# Altium PCB 3LED_WITHE_CYT.PcbDoc
Units mm, origin at the board's own origin, x right, y up, seen from the top; angles counter-clockwise.
Board outline 25.65 x 17.65 mm, 2 copper layers (Top Layer, Bottom Layer); 11 components, 11 nets, 44 pads, 0 vias.
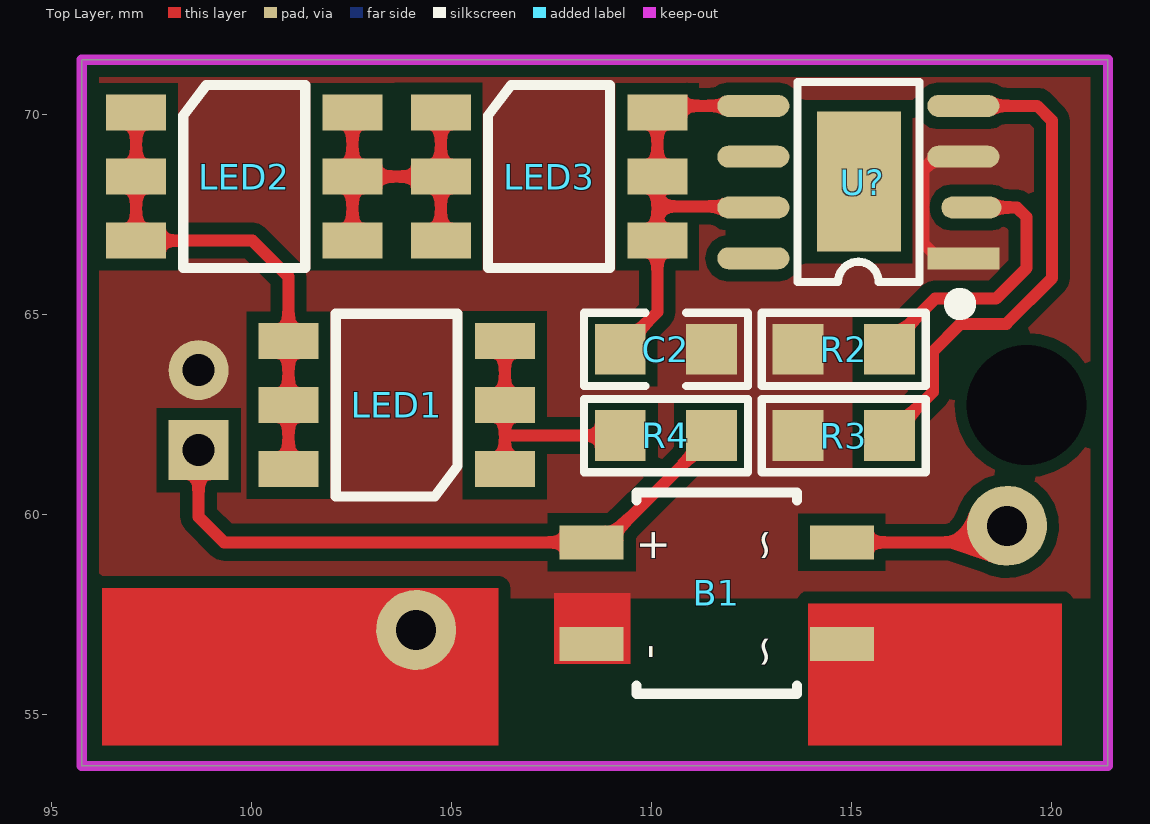
[diagram p0: Top Layer view]
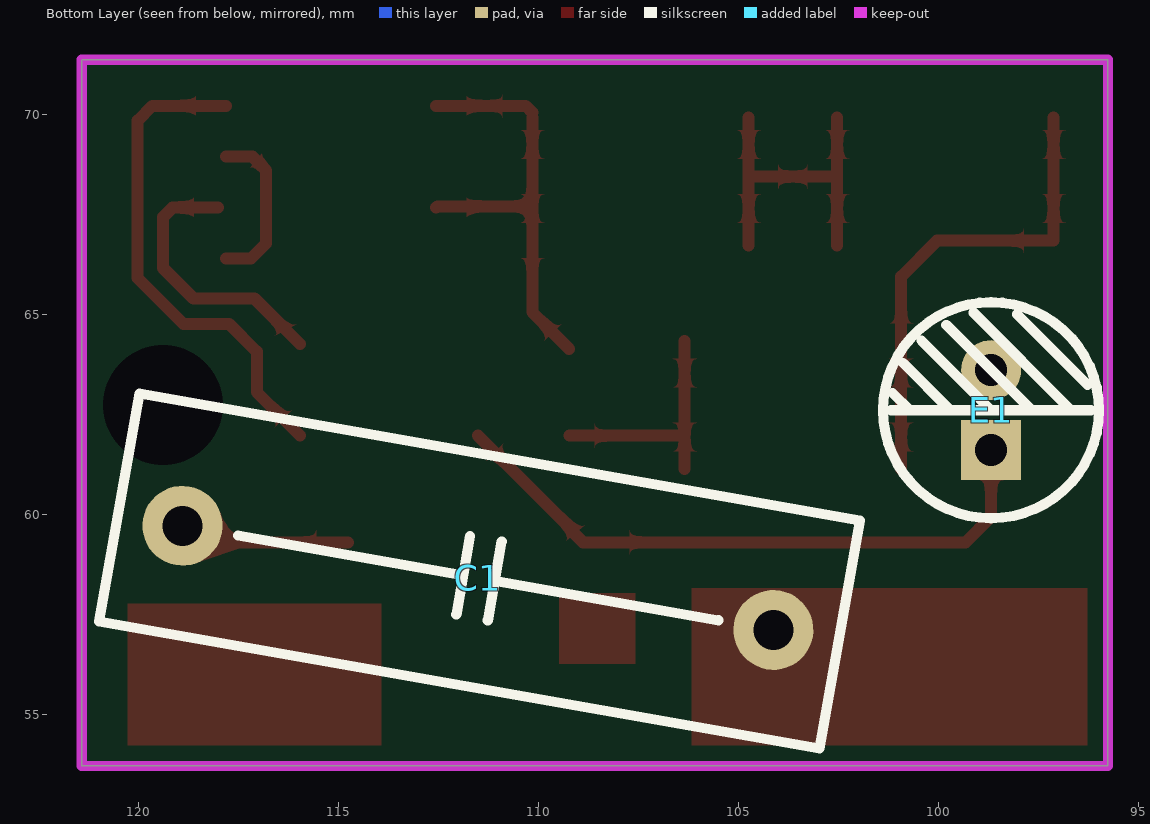
[diagram p1: Bottom Layer view, seen from below]
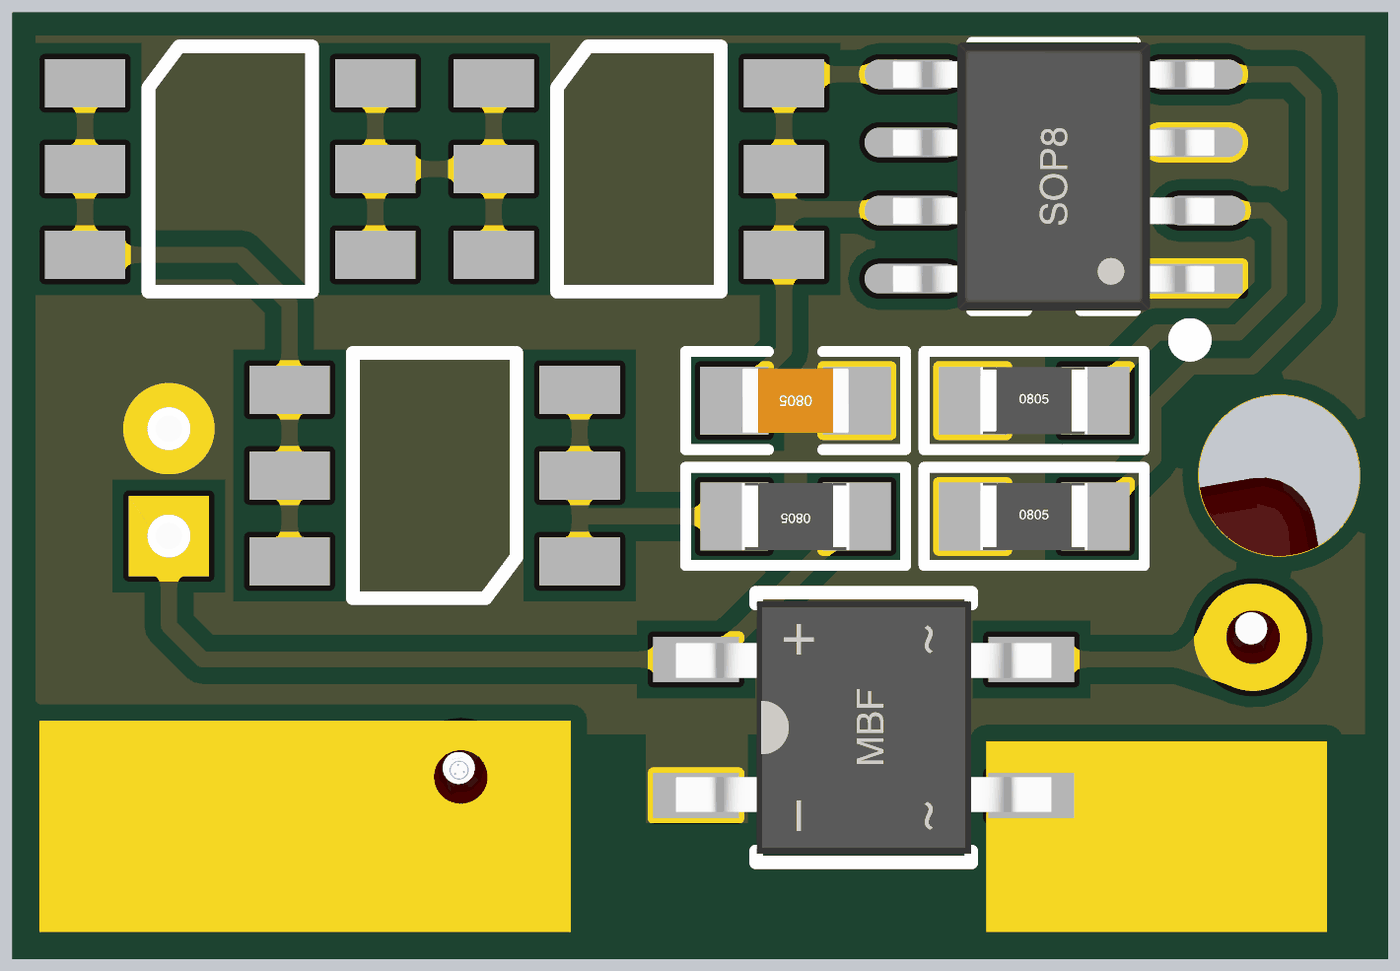
[diagram p2: 3D render of the assembled board from above, using the file's embedded part models]

## Layer stack, top to bottom
Top Solder: solder mask 0.0102, Solder Resist, Dk 3.5
Top Layer: signal copper 0.0356
Dielectric 1: dielectric 0.32, FR-4, Dk 4.8
Bottom Layer: signal copper 0.0356
Bottom Solder: solder mask 0.0102, Solder Resist, Dk 3.5

## Board outline
95.758,53.721 95.758,71.374 121.412,71.374 121.412,53.721

## Design rules (kind name [scope] priority, off if disabled: settings)
Clearance [All] p1: gap=0.3 ignorepadtopadclearanceinfootprint=FALSE
PolygonConnect PolygonConnect_1 [All vs IsNamedPolygon('GND1_L01_P000')] p1: connectstyle=Direct reliefconductorwidth=0.254 reliefentries=4 polygonreliefangle="90 Angle" airgapwidth=0.254
PolygonConnect [All] p2: connectstyle=Relief reliefconductorwidth=0.254 reliefentries=4 polygonreliefangle="90 Angle" airgapwidth=0.254
RoomDefinition Mine [InComponentClass('Mine')] p1: confinementstyle=ConfineIn formatcopy=TRUE lockcomponents=FALSE outline 95.504,53.594 121.539,53.594 121.539,71.628 95.504,71.628
RoutingVias [All] p1: holewidth=0.711 width=1.27 viastyle="Through Hole" minholewidth=0.711 minwidth=1.27 maxholewidth=0.711 maxwidth=1.27
SolderMaskExpansion [All] p1: expansion=0.102 istentingtop=FALSE
Width [All] p1: maxlimit=1 minlimit=0.3 preferedwidth=0.5
30 further rules are at their usual default settings.

## Components (designator, comment, footprint, x,y, rotation, side; value= is the part's Value field where it differs from the comment)
B1 "MB10F" MBF 111.633,58.039 r180 top
C1 "=Value" "CBB 15*18*11" 111.506,58.42 r10 bottom
C2 "10nF" "C 0805" 110.363,64.135 r180 top
E1 "10uF" "CAP 2.0*5*11" 98.679,62.611 r90 bottom
LED1 "LED 5050 WITHE" "LED 5050" 103.632,62.738 r180 top
LED2 "LED 5050 WITHE" "LED 5050" 99.822,68.453 r0 top
LED3 "LED 5050 WITHE" "LED 5050" 107.442,68.453 r0 top
R2 "=Value" "R 0805" 114.808,64.135 r0 top
R3 "=Value" "R 0805" 114.808,61.976 r0 top
R4 "=Value" "R 0805" 110.363,61.976 r180 top
U? "CYT100A" SOP8_N-EP 115.174,68.315 r180 top

## Footprints (in the part's own frame and the unit in brackets; to place one, negate y for a bottom-side part, rotate by r counter-clockwise, add the part's x,y. Pads: shape width x height; smd on the part's side, far side on the other; paste and mask are expansions set on the pad)
"C 0805" [mil] "ï؟½ق¼ï؟½ï؟½ï؟½ï؟½ï؟½ئ¬ï؟½ï؟½ï؟½ï؟½"
  rect 50x50 smd: 1(-45,0) 2(45,0)
  silkscreen extent -81,-36 81,36, body extent -39,-24 39,24, height 20
"CAP 2.0*5*11" [mm] "ï؟½إ¾ï؟½2mmض±ï؟½ï؟½5mmï؟½ك¶ï؟½11mm"
  rect 1.5x1.5 hole 0.8: 1(-1,0)
  round 1.5 hole 0.8: 2(1,0)
  silkscreen extent -2.7,-2.7 2.7,2.7, body extent -2.5,-2.5 2.51,2.5, height 11.04
"CBB 15*18*11" [mm] "ï؟½إ¾ï؟½15mmï؟½ï؟½18mmï؟½ï؟½11mm"
  round 2 hole 1: 1(-7.5,0) 2(7.5,0)
  silkscreen extent -9.15,-3.07 9.14,2.72, body extent -9.01,-2.92 8.99,2.58, height 11.53
"LED 5050" [mm] "ï؟½ï؟½ة«5050LED"
  rect 1.5x0.9 smd: 1(-2.705,1.6) 2(-2.705,0) 3(-2.705,-1.6) 4(2.705,-1.6) 5(2.705,0) 6(2.705,1.6)
  silkscreen extent -1.52,-2.29 1.52,2.29, body extent -2.7,-2.5 2.7,2.5, height 1.65
MBF [mm] "4.7*7*1.5mm(³¤؟ي¸ك)"
  rect 1.6x0.85 smd: AC1(-3.127,1.27) AC2(-3.127,-1.27) DC+(3.127,-1.27) DC-(3.127,1.27)
  silkscreen extent -2.01,-2.51 2.01,2.51, body extent -3.5,-2.35 3.5,2.35, height 1.6
"R 0805" [mm] "1/8Wï؟½ï؟½ئ¬ï؟½ï؟½ï؟½ï؟½"
  rect 1.27x1.27 smd: 1(-1.143,0) 2(1.143,0)
  silkscreen extent -2.05,-0.91 2.05,0.91, body extent -1,-0.62 1,0.63, height 0.5
SOP8_N-EP [mm] "5*6*1.8mm£¨³¤؟ي¸ك£©"
  rect 1.8x0.55 smd: 1(-2.625,1.905)
  oval 1.5x0.55 smd: 2(-2.826,0.635)
  oval 1.8x0.55 smd: 3(-2.625,-0.635) 4(-2.625,-1.905) 5(2.625,-1.905) 6(2.625,-0.635) 7(2.625,0.635) 8(2.625,1.905)
  rect 2.1x3.5 smd: 9(-0.015,-0.011)
  silkscreen extent -2.69,-2.5 1.52,3.2, body extent -3,-2.5 3,2.5, height 1.9

## Part data
B1: "1KV/0.8A rectifier bridge", BOM名称=1KV/0.8A整流桥, 学习资源=www.ooocke.com, 版权归属=源创客
C1: library part C-CBB, "CBB capacitor", BOM名称=CBB电容, 学习资源=www.ooocke.com, 版权归属=源创客
C2: library part C, "Non-polar patch capacitor", BOM名称=无极性贴片电容, 学习资源=www.ooocke.com, 版权归属=源创客
E1: library part C-CAP, "Inline electrolytic capacitor", BOM名称=直插电解电容, 学习资源=www.ooocke.com, 版权归属=源创客
LED1 LED2 LED3: library part LED-SMD, "Patch LED", BOM名称=贴片LED, 学习资源=www.ooocke.com, 版权归属=源创客
R2 R3 R4: library part R, "Chip resistor", BOM名称="Chip resistor", 学习资源=www.ooocke.com, 版权归属=源创客
U?: library part CYT1000A

## Free pads (board coordinates)
  round 0 hole 3: 2(119.38,62.738)

## Nets (pads, with @x,y where several pads share a name; then routed paths per layer and width w, separated by ;. In a path a pad name is that pad's centre, name@x,y a point inside that pad or via, vN(x,y) a via of type N, cw(c..) or ccw(c..) an arc to the next point about the centre after c; other vN are vias at no path point)
FASE: C1.1
GND1: B1.DC- C2.1 E1.2 R2.1 R3.1 U?.1 U?.3 | length 4.1
  Top Layer w0.3: U?.1 117.174,66.41 116.8,66.783 116.8,68.609 117.141,68.95 U?.3
NetB1_AC2: B1.AC2 C1.2 | length 4.9
  Top Layer w0.3: B1.AC2 118.019,59.309 118.107,59.397 119.465,59.397 C1.2@119.553,59.309
NetB1_DC+: B1.DC+ E1.1 R4.1 | length 15.9
  Top Layer w0.3: E1.1 98.679,59.944 99.314,59.309 108.881,59.309 109.156,59.584 109.156,59.626 R4.1
NetLED1_1: LED1.1 LED1.2 LED1.3 R4.2 | length 6.1
  Top Layer w0.3: LED1.1 106.337,61.938 ; LED1.3 LED1.2 106.337,61.938 ; R4.2 106.375,61.976 106.337,61.938
NetLED1_2: LED1.4 LED1.5 LED1.6 LED2.1 LED2.2 LED2.3 | length 12.1
  Top Layer w0.3: LED2.1@97.117,69.926 LED2.2 LED2.3 100.025,66.853 100.927,65.951 LED1.4 LED1.5 LED1.6
NetLED2_2: LED2.4 LED2.5 LED2.6 LED3.1 LED3.2 LED3.3 | length 8.6
  Top Layer w0.3: LED2.4@102.527,66.726 102.527,68.326 LED2.6@102.527,69.926 ; LED2.5 LED3.2 ; LED3.3@104.737,66.726 104.737,68.326 LED3.1@104.737,69.926
NULL: B1.AC1
OUT1: C2.2 LED3.4 LED3.5 LED3.6 U?.5 U?.7 | length 11
  Top Layer w0.3: C2.2@109.228,64.143 110.147,65.062 110.147,67.705 ; LED3.6@110.147,69.926 LED3.5 110.147,67.705 ; LED3.6 110.314,70.22 U?.5 ; U?.7 112.523,67.705 110.147,67.705
REXT1: R2.2 U?.2 | length 7
  Top Layer w0.3: R2.2@115.951,64.262 117.094,65.405 118.618,65.405 119.38,66.167 119.38,67.437 119.137,67.68 U?.2
REXT2: R3.2 U?.4 | length 12.6
  Top Layer w0.3: R3.2 117.036,63.061 117.036,64.077 117.729,64.77 118.872,64.77 120.015,65.913 120.015,69.85 119.645,70.22 U?.4
pads on no net: U?.6 U?.8 U?.9

## Polygon pours and split planes (outlines as drawn)
GND1 on Top Layer "GND1_L01_P000" (solid, remove dead copper, pour order 0): 95.758,57.912 95.758,71.374 121.412,71.374 121.412,57.912

## Keep-outs
Keep-Out Layer:
  the board outline again, w0.254

## Other copper
Top Layer:
  rectangle net NULL: 113.919,54.229 120.269,57.785
  rectangle net FASE: 96.266,54.229 106.172,58.166
  rectangle net GND1: 107.569,56.261 109.474,58.039

## Silkscreen, mask and mechanical layers (free items; w line width, h text height)
Top Solder:
  rectangle: 96.266,54.229 106.172,58.166
  rectangle: 113.919,54.229 120.269,57.785

## Text inside footprints (layer, text, board x,y; h text height)
B1: Top Overlay "~" at 112.268,56.134 h1.3 r270; Top Overlay "~" at 112.268,58.801 h1.3 r270; Top Overlay "-" at 109.474,56.388 h1.3 r270; Top Overlay "+" at 109.474,58.801 h1.3 r270